# Altium PCB SNES PicoCIC v1.0.PcbDoc
Units mm, origin at the board's own origin, x right, y up, seen from the top; angles counter-clockwise.
Board outline 7.5 x 11 mm, 2 copper layers (Top Layer, Bottom Layer); 17 components, 13 nets, 41 pads, 24 vias.
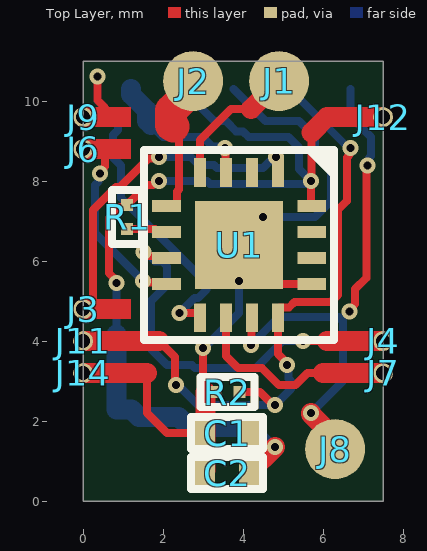
[diagram p0: Top Layer view]
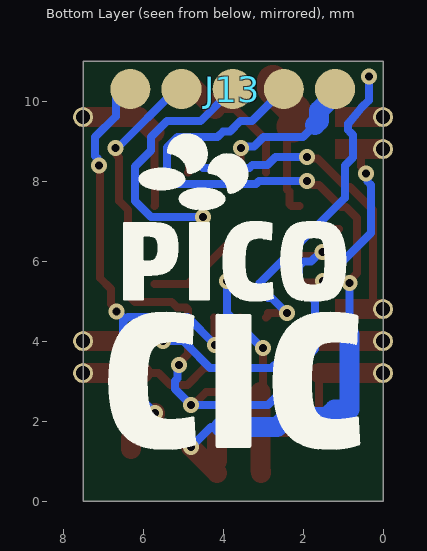
[diagram p1: Bottom Layer view, seen from below]

## Layer stack, top to bottom
Top Solder: solder mask 0.0102, Solder Resist, Dk 3.5
Top Layer: signal copper 0.0356
Dielectric 1: dielectric 0.32, FR-4, Dk 4.8
Bottom Layer: signal copper 0.0356
Bottom Solder: solder mask 0.0102, Solder Resist, Dk 3.5

## Board outline
0,0 0,11 7.5,11 7.5,0

## Design rules (kind name [scope] priority, off if disabled: settings)
Clearance [All] p1: gap=0.2 ignorepadtopadclearanceinfootprint=TRUE except(0: Arc-Hole Track-Hole SMDPad-Hole THPad-Hole Via-Hole Fill-Hole Poly-Hole Region-Hole Text-Hole)
HoleToHoleClearance [All] p1: gap=0.2 allowstackedmicrovias=TRUE
MinimumSolderMaskSliver [All] p1: minsoldermaskwidth=0
PolygonConnect [All] p1: connectstyle=Relief reliefconductorwidth=0.254 reliefentries=4 polygonreliefangle="90 Angle" airgapwidth=0.254
RoutingVias [All] p1: holewidth=0.2 width=0.4 viastyle="Through Hole" minholewidth=0.2 minwidth=0.4 maxholewidth=6 maxwidth=6
SilkToSilkClearance [All] p1: silktosilkclearance=0
SilkToSolderMaskClearance [IsPad] p1: minsilkscreentomaskgap=0 clearancetoexposedcopper=TRUE
SolderMaskExpansion [IsVia] p1: expansion=0.102 istentingtop=TRUE
Width [All] p1: maxlimit=6 minlimit=0.2 preferedwidth=0.2 minimp=50.000000 maximp=50.000000 favimp=50.000000
26 further rules are at their usual default settings.

## Components (designator, comment, footprint, x,y, rotation, side; value= is the part's Value field where it differs from the comment)
C1 "0.1uF" C0402 3.6,1.7 r0 top
C2 "1uF" C0402 3.6,0.7 r0 top
J1 "SP" SP1.5 4.9,10.5 r0 top
J2 "SP" SP1.5 2.75,10.5 r0 top
J3 "0.8MM Castellated Pad" "0.8MM CASTELLATED PAD" 0,4.8 r270 top
J4 "0.8MM Castellated Pad" "0.8MM CASTELLATED PAD" 7.5,4 r90 top
J6 "0.8MM Castellated Pad" "0.8MM CASTELLATED PAD" 0,8.8 r270 top
J7 "0.8MM Castellated Pad" "0.8MM CASTELLATED PAD" 7.5,3.2 r90 top
J8 "SP" SP1.5 6.3,1.3 r0 top
J9 "0.8MM Castellated Pad" "0.8MM CASTELLATED PAD" 0,9.6 r270 top
J11 "0.8MM Castellated Pad" "0.8MM CASTELLATED PAD" 0,4 r270 top
J12 "0.8MM Castellated Pad" "0.8MM CASTELLATED PAD" 7.5,9.6 r90 top
J13 "JTAG-SWD2" "JTAG-SWD 1.28mm" 1.2,10.3 r0 bottom
J14 "0.8MM Castellated Pad" "0.8MM CASTELLATED PAD" 0,3.2 r270 top
R1 "10k" R0201 1.1,7.1 r90 top
R2 "10k" R0201 3.608,2.723 r0 top
U1 "PIC16F676-I/ML" "QFN-16 4X4" 3.9,6.4 r270 top locked

## Footprints (in the part's own frame and the unit in brackets; to place one, negate y for a bottom-side part, rotate by r counter-clockwise, add the part's x,y. Pads: shape width x height; smd on the part's side, far side on the other; paste and mask are expansions set on the pad)
"0.8MM CASTELLATED PAD" [mm]
  round 0.5 hole 0.35 mask+0: 1(0,0)
  Top Layer region: -0.248,0 0.252,0 0.252,1.2 -0.248,1.2
C0402 [mm]
  rect 0.5x0.6 smd mask+0: 1(-0.55,0) 2(0.55,0)
  silkscreen extent -0.9,-0.4 0.9,0.4, body extent -0.5,-0.25 0.5,0.25, height 0.5
"JTAG-SWD 1.28mm" [mm] "JTAG-SWD Solder pads 2.54mm pitch"
  round 1 smd mask+0: 1(0,0) 2(1.28,0) 3(2.56,0) 4(3.84,0) 5(5.12,0)
"QFN-16 4X4" [mm]
  rect 0.72x0.3 smd mask+0: 1(-1.815,0.975) 2(-1.815,0.325) 3(-1.815,-0.325) 4(-1.815,-0.975) 9(1.815,-0.975) 10(1.815,-0.325) 11(1.815,0.325) 12(1.815,0.975)
  rect 0.3x0.72 smd mask+0: 5(-0.975,-1.815) 6(-0.325,-1.815) 7(0.325,-1.815) 8(0.975,-1.815) 13(0.975,1.815) 14(0.325,1.815) 15(-0.325,1.815) 16(-0.975,1.815)
  rect 2.2x2.2 smd mask+0: 17(0,0)
  silkscreen extent -2.38,-2.38 2.38,2.38, body extent -2,-2 2,2, height 0.76
R0201 [mm]
  rect 0.3x0.3 smd mask+0: 1(-0.3,0) 2(0.3,0)
  silkscreen extent -0.67,-0.38 0.67,0.38, body extent -0.3,-0.15 0.3,0.15, height 0.25
SP1.5 [mm] "1.5mm solder pad"
  round 1.5 smd mask+0: 1(0,0)

## Part data
C1: library part CAP_0UF1_0402, "Capacitor Ceramic 0.1uF 16V X5R 0402", Capacitance=0.10µF, Manufacturer=Yageo, Manufacturer Part Number=CC0402KRX7R7BB104, Operating Temperature="-55°C ~ 125°C", Package / Case="0402 (1005 Metric)", Ratings=-, Supplier Part Number 1=311-1338-2-ND, Temperature Coefficient=X7R, Tolerance=±10%, Voltage - Rated=16V, Applications="General Purpose", Category=Capacitors, ComponentLink1Description=http://www.yageo.com/documents/recent/UPY-GPHC_X7R_6.3V-to-50V_13.pdf, ComponentLink1URL=http://www.yageo.com/documents/recent/UPY-GPHC_X7R_6.3V-to-50V_13.pdf, Features=-, Height - Seated (Max)=-, Lead Spacing=-, Lead Style=-, Mounting Type="Surface Mount, MLCC", Packaging="Tape & Reel (TR)", Pricing 1="10000=0.00149, 20000=0.00142, 30000=0.00135, 50000=0.0012, 100000=0.00097 (GBP)", RoHS="RoHS Compliant", Size / Dimension="0.039\" L x 0.020\" W (1.00mm x 0.50mm)", Stock 1=190000, Supplier 1=Digi-Key, Thickness (Max)="0.022\" (0.55mm)"
C2: library part CAP_1UF_0402, "Capacitor Ceramic 1uF 10V X5R 0402", Capacitance=1µF, Manufacturer="Murata Electronics North America", Manufacturer Part Number=GRM155R61A105KE15D, Operating Temperature="-55°C ~ 85°C", Package / Case="0402 (1005 Metric)", Ratings=-, Supplier Part Number 1=490-3890-2-ND, Temperature Coefficient=X5R, Tolerance=±10%, Voltage - Rated=10V, Applications="General Purpose", Category=Capacitors, ComponentLink1Description=http://www.murata.com/~/media/webrenewal/support/library/catalog/products/capacitor/mlcc/c02e.pdf, ComponentLink1URL=http://www.murata.com/~/media/webrenewal/support/library/catalog/products/capacitor/mlcc/c02e.pdf, Features=-, Height - Seated (Max)=-, Lead Spacing=-, Lead Style=-, Mounting Type="Surface Mount, MLCC", Packaging="Tape & Reel (TR)", Pricing 1="10000=0.0051, 20000=0.00485, 30000=0.00461, 50000=0.00412, 100000=0.00334 (GBP)", RoHS="RoHS Compliant", Size / Dimension="0.039\" L x 0.020\" W (1.00mm x 0.50mm)", Stock 1=2580000, Supplier 1=Digi-Key, Thickness (Max)="0.022\" (0.55mm)"
J1 J2 J8: "Solder pad"
J3 J4 J6 J7 J9 J11 J12 J14: "Castellated pad for 0.8mm pitch"
J13: "JTAG-SWD Connector"
R1 R2: library part RES_10K_0201, "Resistor 10k 0.05W 0201", Manufacturer=Yageo, Manufacturer Part Number=RC0201JR-0710KL, Operating Temperature="-55°C ~ 125°C", Package / Case="0201 (0603 Metric)", Power (Watts)="0.05W, 1/20W", Supplier Device Package=0201, Supplier Part Number 1=311-10KNCT-ND, Temperature Coefficient=±200ppm/°C, Tolerance=±5%, Category=Resistors, ComponentLink1Description=http://www.yageo.com/NewPortal/yageodocoutput?fileName=/pdf/R-Chip/PYu-RC_Group_51_RoHS_L_3.pdf, ComponentLink1URL=http://www.yageo.com/NewPortal/yageodocoutput?fileName=/pdf/R-Chip/PYu-RC_Group_51_RoHS_L_3.pdf, Composition="Thick Film", Features="Moisture Resistant", Height="0.010\" (0.26mm)", Number of Terminations=2, Packaging="Cut Tape (CT)", Pricing 1="1=0.07, 10=0.027, 25=0.0196, 100=0.011, 250=0.0084, 500=0.0067, 1000=0.00493, 2500=0.00428, 5000=0.00354 (GBP)", Resistance (Ohms)=10k, RoHS="RoHS Compliant", Size / Dimension="0.024\" L x 0.012\" W (0.60mm x 0.30mm)", Stock 1=194971, Supplier 1=Digi-Key
U1: "MCU 8-bit PIC RISC 1.75KB Flash 2.5V/3.3V/5V Automotive 16-Pin QFN EP Tube", Manufacturer=Microchip, Category=Microcontrollers, ComponentLink1Description=https://datasheet.ciiva.com/17387/40039f-17387672.pdf?src-supplier=Avnet+Europe, ComponentLink1URL=https://datasheet.ciiva.com/17387/40039f-17387672.pdf?src-supplier=Avnet+Europe, ComponentLink2Description=https://datasheet.ciiva.com/1560/40039f-1560604.pdf?src-supplier=Digi-Key, ComponentLink2URL=https://datasheet.ciiva.com/1560/40039f-1560604.pdf?src-supplier=Digi-Key, ComponentLink3Description=https://datasheet.ciiva.com/9241/40039f-9241964.pdf?src-supplier=Avnet, ComponentLink3URL=https://datasheet.ciiva.com/9241/40039f-9241964.pdf?src-supplier=Avnet, Manufacturer Part Number=PIC16F676-I/ML, Pricing 1="1=1.69000, 25=1.66480 (USD)", RoHS=Yes, Stock 1=513, Supplier 1=Digi-Key

## Via types
v1: diameter 0.4, hole 0.2, Top Layer to Bottom Layer, tented both sides, 24 vias

## Nets (pads, with @x,y where several pads share a name; then routed paths per layer and width w, separated by ;. In a path a pad name is that pad's centre, name@x,y a point inside that pad or via, vN(x,y) a via of type N, cw(c..) or ccw(c..) an arc to the next point about the centre after c; other vN are vias at no path point)
CIC1: J9.1 U1.9 | length 9.3
  Top Layer w0.2: v1(0.357,10.616) 0.357,10.021 0.55,9.828 0.55,9.748 0.652,9.748 0.8,9.6 ; v1(2.407,4.7) 2.875,4.7 2.875,4.635 U1.9
  Bottom Layer w0.2: v1(0.357,10.616) 0.357,10.016 0.55,9.823 0.871,9.437 0.871,9.271 0.812,9.212 0.75,9.15 0.75,8.589 0.952,8.388 0.952,7.583 3.084,5.45 3.084,5.284 2.878,5.078 2.785,5.078 v1(2.407,4.7)
CIC2: J6.1 U1.8 | length 4.6
  Top Layer w0.2: v1(0.423,8.186) 0.423,8.24 0.55,8.367 0.55,8.648 0.7,8.798 0.7,8.8 ; v1(1.496,5.504) 1.535,5.465 2.045,5.465 U1.8
  Bottom Layer w0.2: v1(0.423,8.186) 0.385,8.148 0.385,7.985 0.3,7.9 0.3,6.7 v1(1.496,5.504)
CIC7: J3.1 U1.1 | length 8.9
  Top Layer w0.2: J3.1 0.124,4.924 0.226,4.924 ; 0.6,4.7 0.376,4.924 0.226,4.924 ; v1(1.9,8.6) 1.862,8.562 1.638,8.562 0.926,7.85 0.826,7.85 0.25,7.274 0.25,4.948 0.226,4.924 ; v1(4.829,8.6) 4.852,8.577 4.852,8.238 U1.1
  Bottom Layer w0.2: v1(1.9,8.6) 2.692,8.6 2.892,8.4 3.27,8.4 3.344,8.326 4.501,8.326 4.775,8.6 v1(4.829,8.6)
CIC8: J11.1 J13.4 R2.2 U1.12 | length 16.4
  Top Layer w0.2: 1.9,4 2.3,3.6 2.3,2.92 v1(2.32,2.9) ; R2.2 4.422,2.723 4.746,2.4 v1(4.8,2.4) ; v1(5.1,3.4) 5.1,3.454 4.875,3.679 U1.12 4.875,4.795 4.925,4.845 5.154,4.845 5.284,4.975 6.199,4.975 6.375,5.151 6.375,7.282 6.6,7.507 6.6,8.595 6.647,8.642 6.647,8.783 v1(6.685,8.821)
  Top Layer w0.5: 0.9,4 1.9,4
  Bottom Layer w0.2: v1(2.32,2.9) 2.374,2.9 2.874,2.4 v1(4.8,2.4) 5.2,2.8 5.2,3 5.138,3.062 5.138,3.362 v1(5.1,3.4) ; J13.4 5.166,10.3 6.644,8.821 v1(6.685,8.821)
CIC10: J7.1 U1.10 | length 4.7
  Top Layer w0.2: U1.10 3.575,3.625 3.877,3.323 4.469,3.323 4.893,2.9 5.314,2.9 5.614,3.2 6,3.2
  Top Layer w0.5: 6,3.2 6.9,3.2
CIC11: J4.1 U1.7 | length 8.9
  Top Layer w0.2: v1(1.514,6.221) 1.54,6.221 1.636,6.125 2.035,6.125 U1.7 ; v1(5.5,4) 6.1,4
  Top Layer w0.5: 6.1,4 6.5,4
  Bottom Layer w0.2: v1(1.514,6.221) 1.568,6.221 1.804,5.986 1.983,5.986 2.1,5.869 2.1,5.4 1.7,5 1.7,3.8 2.1,3.4 2.718,3.4 2.793,3.325 4.325,3.325 4.6,3.6 4.6,3.607 4.993,4 v1(5.5,4)
GND: C1.1 C2.1 J13.3 J14.1 R2.1 U1.13 U1.17 | length 17.3
  Top Layer w0.2: 1.6,3.2 1.6,2.2 2.1,1.7 C1.1 ; v1(3,3.825) 3,2.782 3.058,2.723 ; U1.17 4.875,5.425 U1.13
  Top Layer w0.5: 0.6,3.2 1.6,3.2 ; C2.1 3.05,0.75 3.058,0.758 3.058,2.723
  Bottom Layer w0.2: v1(3,3.825) 3.025,3.825 3.9,4.7 v1(3.9,5.5) ; J13.3 4.56,9.5 5.4,9.5 5.8,9.1 5.8,8.766 6.2,8.366 6.2,7.5 5.8,7.1 v1(4.5,7.1)
LED_ANODE_MODE: R1.1 U1.6 | length 1
  Top Layer w0.2: R1.1 1.8,6.8 1.875,6.725 U1.6
LED_GRN_50: J1.1 U1.4 | length 3.4
  Top Layer w0.2: U1.4 2.925,9.025 3.7,9.8 4.2,9.8
  Top Layer w0.5: 4.2,9.8 J1.1
LED_RED_60: J2.1 U1.5 | length 3.7
  Top Layer w0.2: U1.5 2.295,7.375 2.345,7.425 2.345,7.738 2.4,7.793 2.4,9.1 2.362,9.138 2.362,9.269 2.266,9.366
  Top Layer w0.8: 2.266,9.366 2.231,9.4 2.2,9.4 2.2,9.761 2.75,10.311 J2.1
PPU_REGION: J8.1 J13.5 U1.11 | length 13.4
  Top Layer w0.2: v1(4.2,3.907) 4.212,3.92 4.212,4.572 U1.11 ; v1(6.666,4.734) 6.666,4.788 6.8,4.923 6.8,5.3 7.083,5.583 7.083,8.371 v1(7.106,8.394)
  Top Layer w0.5: v1(5.7,2.2) 5.7,2.171 6.3,1.571 J8.1
  Bottom Layer w0.2: v1(4.2,3.907) 4.893,4.6 6.383,4.6 6.5,4.483 ; v1(5.7,2.2) 6.5,3 6.5,4.483 ; v1(6.666,4.734) 6.634,4.734 6.5,4.6 6.5,4.483 ; J13.5@6.68,10.3 6.683,10.297 6.683,9.617 7.2,9.1 7.2,8.629 7.144,8.573 7.144,8.432 v1(7.106,8.394)
REG_TIMEOUT: J13.1 U1.3 | length 4
  Top Layer w0.2: v1(3.551,8.826) 3.563,8.814 3.563,8.227 U1.3
  Bottom Layer w0.2: 1.6,9.3 1.6,9.5 ; 1.7,9.4 2,9.1 2.991,9.1 3.227,8.864 3.513,8.864 v1(3.551,8.826)
  Bottom Layer w0.5: J13.1 1.2,10.165 1.6,9.765 1.6,9.5 1.7,9.4
VCC: C1.2 C2.2 J12.1 J13.2 R1.2 U1.16 | length 24
  Top Layer w0.2: v1(0.836,5.457) 0.836,5.511 0.65,5.697 0.65,7.074 0.926,7.35 1.05,7.35 1.6,7.9 1.746,7.9 1.846,8 v1(1.9,8) ; v1(5.7,8) 5.7,7.39 U1.16 ; v1@5.715,8.015 5.715,9.215
  Top Layer w0.5: C2.2 v1(4.801,1.351) ; 4.15,1 C1.2 ; 5.715,9.215 6.1,9.6 6.8,9.6
  Bottom Layer w0.2: 0.836,4.164 v1(0.836,5.457) ; v1(1.9,8) 3.104,8 3.178,7.926 5.572,7.926 5.646,8 v1(5.7,8) ; J13.2 3.28,9.5 3.57,9.5 3.827,9.243 3.997,9.243 4.14,9.1 5.137,9.1 5.4,8.837 5.4,8.3 v1@5.696,8.004 ; 4.052,1.85 4.302,1.85 v1(4.801,1.351)
  Bottom Layer w0.5: 0.836,4.164 0.836,2.284 1.216,2.284 1.35,2.15 ; 1.3,2.2 1.396,2.104 2.392,2.104 2.646,1.85 4.052,1.85
pads on no net: U1.2 U1.14 U1.15

## Silkscreen, mask and mechanical layers (free items; w line width, h text height)
Bottom Overlay:
  drawing of 11 lines, arcs and shapes, not listed
Board:
  the board outline again, w0.254